# EAGLE board MODULO2_1 (EAGLE 7.1.0)
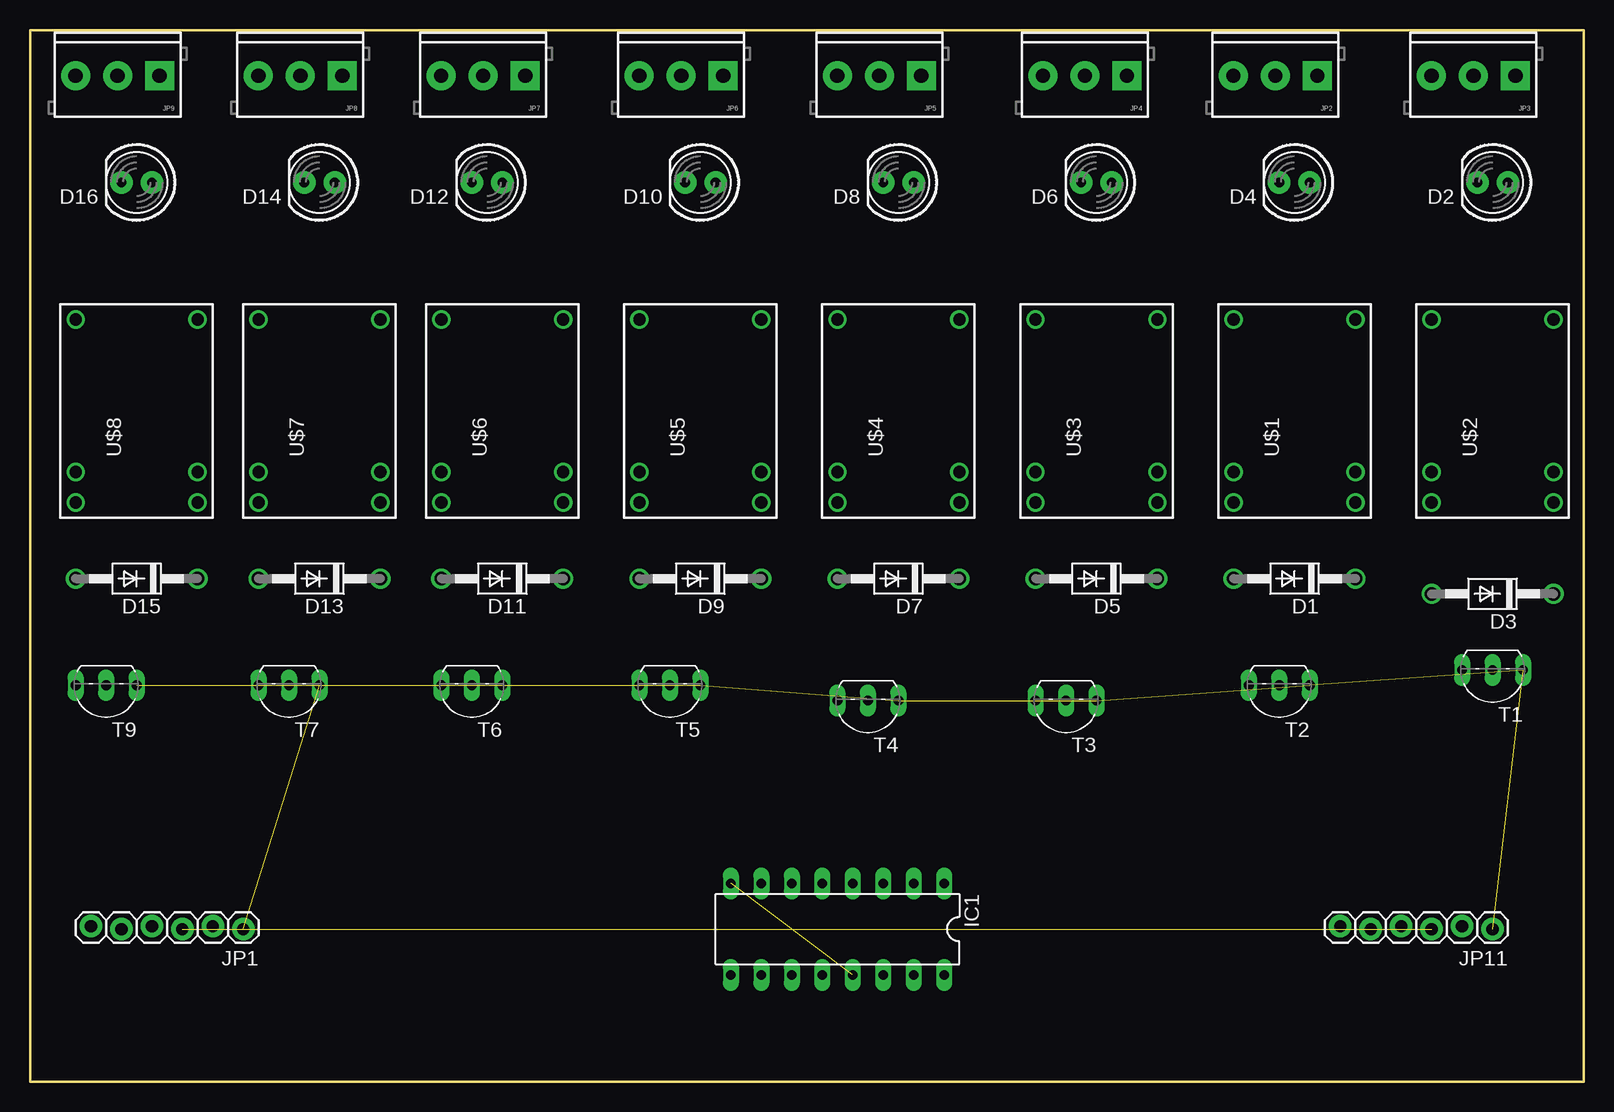
[diagram p0: board, top side]
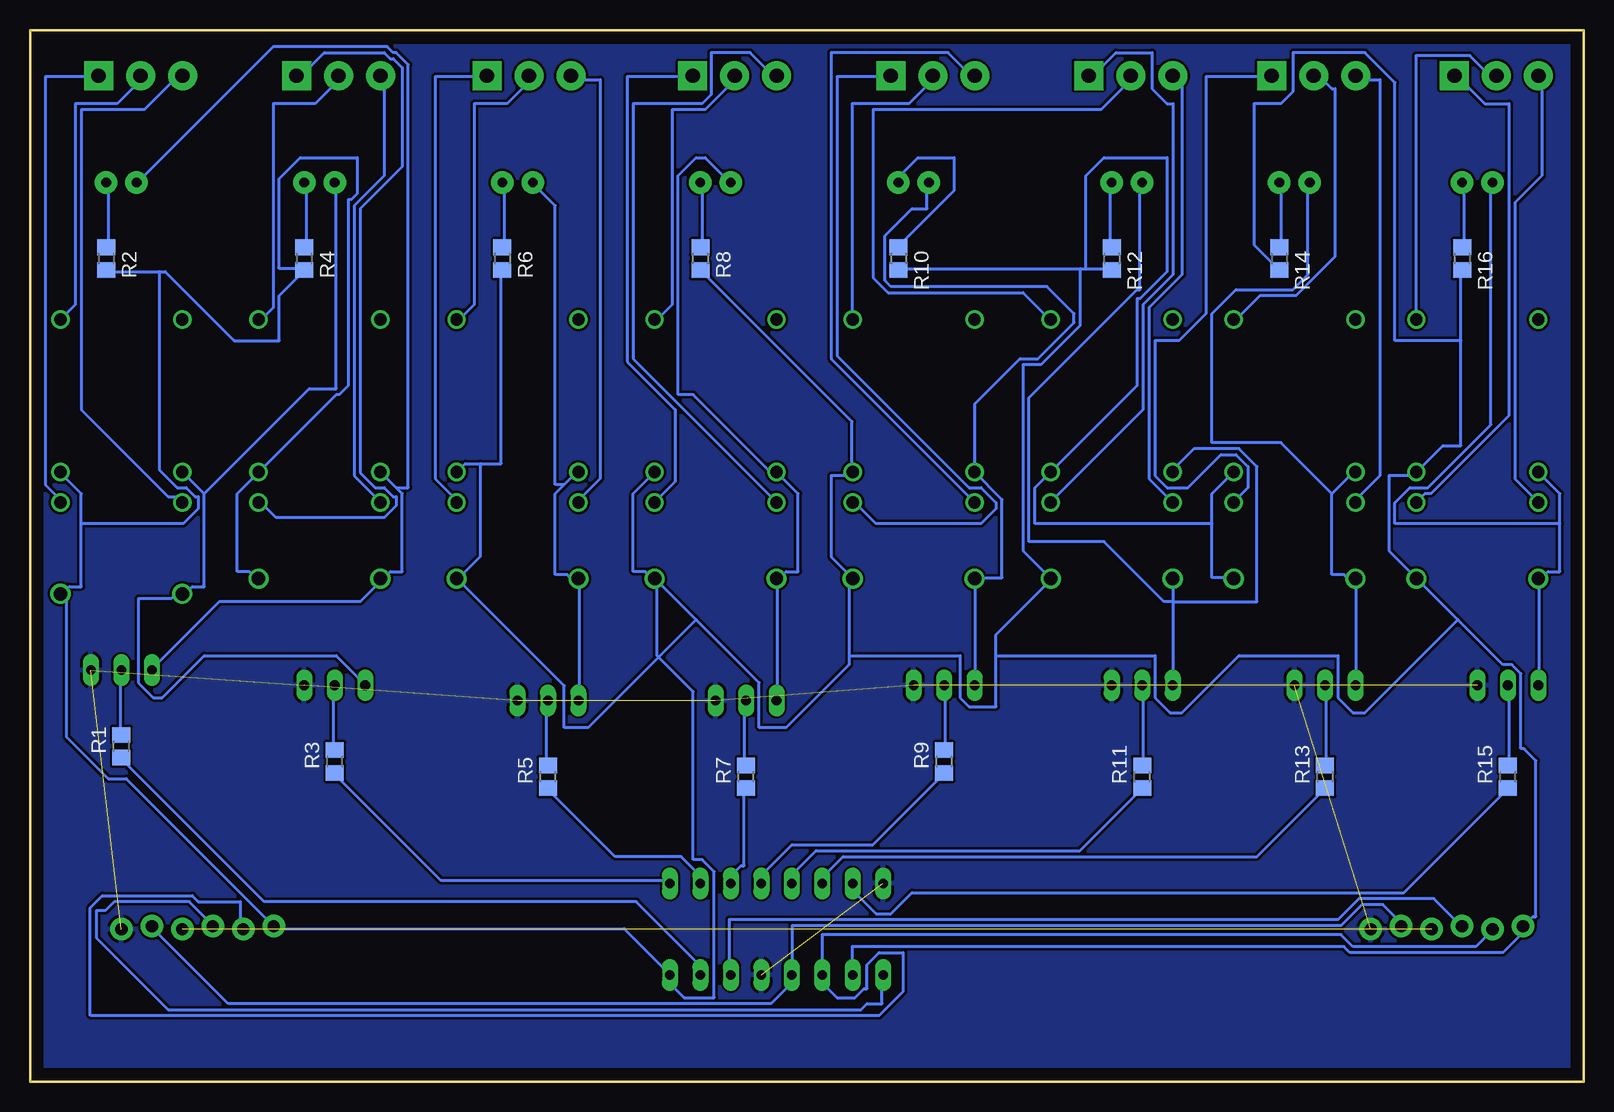
[diagram p1: board, bottom side, seen from below]

Size 129.54 x 87.63 mm. Coordinates in mm from the lower left corner, seen from the top.
Outline: 0,0 129.54,0 129.54,87.63 0,87.63 0,0
Copper layers (1*16): Top 0.035mm / dielectric 1.5mm / Bottom 0.035mm
Design rules "default": minimum track width 10mil, minimum drill 24mil, track to track 8mil, track to pad 8mil, pad to pad 8mil, via to via 8mil, smd to smd 8mil, copper to edge 40mil, drill to drill 8mil, minimum pad ring 10mil, minimum via ring 8mil, stop-mask expansion 4mil, vias tented up to drill 0mil, thermal gap 10mil

## Footprints (pad centres in the part's own frame; a part is rotated, then mirrored left to right if it is on the bottom)
DO41-10 = drill 1.118: A 5.08,0; C -5.08,0
LED5MM = drill 0.813 pad 1.88: A -1.27,0; K 1.27,0
DIL16 = drill 0.813 long: 1 -8.89,-3.81; 2 -6.35,-3.81; 3 -3.81,-3.81; 4 -1.27,-3.81; 5 1.27,-3.81; 6 3.81,-3.81; 7 6.35,-3.81; 8 8.89,-3.81; 9 8.89,3.81; 10 6.35,3.81; 11 3.81,3.81; 12 1.27,3.81; 13 -1.27,3.81; 14 -3.81,3.81; 15 -6.35,3.81; 16 -8.89,3.81
1X06_LOCK = drill 1.016 pad 1.88: 1 0,0; 2 2.54,-0.254; 3 5.08,0; 4 7.62,-0.254; 5 10.16,0; 6 12.7,-0.254
SCREWTERMINAL-3.5MM-3 = drill 1.2 pad 2.413 square: 1 0,0 | drill 1.2 pad 2.413: 2 3.5,0; 3 7,0
R0805 = smd 1.3 x 1.5: 1 -0.95,0; 2 0.95,0
TO92-EBC = drill 0.813 long: B 0,-1.27; C 2.54,-1.27; E -2.54,-1.27
HK4100 = drill 1.016: 1 7.62,5.08; 6 -5.08,5.08; 7 -7.62,5.08; 8 -7.62,-5.08; 9 -5.08,-5.08; 14 7.62,-5.08

## Placement (x,y rotation side)
D1  1N4933  [DO41-10]  105.41,41.91 180 top
D2  [LED5MM]  121.92,74.93 180 top
D3  1N4933  [DO41-10]  121.92,40.64 180 top
D4  [LED5MM]  105.41,74.93 180 top
D5  1N4933  [DO41-10]  88.9,41.91 180 top
D6  [LED5MM]  88.9,74.93 180 top
D7  1N4933  [DO41-10]  72.39,41.91 180 top
D8  [LED5MM]  72.39,74.93 180 top
D9  1N4933  [DO41-10]  55.88,41.91 180 top
D10  [LED5MM]  55.88,74.93 180 top
D11  1N4933  [DO41-10]  39.37,41.91 180 top
D12  [LED5MM]  38.1,74.93 180 top
D13  1N4933  [DO41-10]  24.13,41.91 180 top
D14  [LED5MM]  24.13,74.93 180 top
D15  1N4933  [DO41-10]  8.89,41.91 180 top
D16  [LED5MM]  8.89,74.93 180 top
IC1  74HC595N  [DIL16]  67.31,12.7 180 top
JP1  [1X06_LOCK]  17.78,12.7 180 top
JP2  [SCREWTERMINAL-3.5MM-3]  107.31,83.82 180 top
JP3  [SCREWTERMINAL-3.5MM-3]  123.83,83.82 180 top
JP4  [SCREWTERMINAL-3.5MM-3]  91.44,83.82 180 top
JP5  [SCREWTERMINAL-3.5MM-3]  74.3,83.82 180 top
JP6  [SCREWTERMINAL-3.5MM-3]  57.78,83.82 180 top
JP7  [SCREWTERMINAL-3.5MM-3]  41.27,83.82 180 top
JP8  [SCREWTERMINAL-3.5MM-3]  26.04,83.82 180 top
JP9  [SCREWTERMINAL-3.5MM-3]  10.79,83.82 180 top
JP11  [1X06_LOCK]  121.92,12.7 180 top
R1  [R0805]  121.92,27.94 90 bottom
R2  [R0805]  123.19,68.58 270 bottom
R3  [R0805]  104.14,26.67 90 bottom
R4  [R0805]  106.68,68.58 270 bottom
R5  [R0805]  86.36,25.4 90 bottom
R6  [R0805]  90.17,68.58 270 bottom
R7  [R0805]  69.85,25.4 90 bottom
R8  [R0805]  73.66,68.58 270 bottom
R9  [R0805]  53.34,26.67 90 bottom
R10  [R0805]  57.15,68.58 270 bottom
R11  [R0805]  36.83,25.4 90 bottom
R12  [R0805]  39.37,68.58 270 bottom
R13  [R0805]  21.59,25.4 90 bottom
R14  [R0805]  25.4,68.58 270 bottom
R15  [R0805]  6.35,25.4 90 bottom
R16  [R0805]  10.16,68.58 270 bottom
T1  [TO92-EBC]  121.92,33.02 180 top
T2  [TO92-EBC]  104.14,31.75 180 top
T3  [TO92-EBC]  86.36,30.48 180 top
T4  [TO92-EBC]  69.85,30.48 180 top
T5  [TO92-EBC]  53.34,31.75 180 top
T6  [TO92-EBC]  36.83,31.75 180 top
T7  [TO92-EBC]  21.59,31.75 180 top
T9  [TO92-EBC]  6.35,31.75 180 top
U$1  HK4100_DC5V_SHGHK  [HK4100]  105.41,55.88 90 top
U$2  HK4100_DC5V_SHGHK  [HK4100]  121.92,55.88 90 top
U$3  HK4100_DC5V_SHGHK  [HK4100]  88.9,55.88 90 top
U$4  HK4100_DC5V_SHGHK  [HK4100]  72.39,55.88 90 top
U$5  HK4100_DC5V_SHGHK  [HK4100]  55.88,55.88 90 top
U$6  HK4100_DC5V_SHGHK  [HK4100]  39.37,55.88 90 top
U$7  HK4100_DC5V_SHGHK  [HK4100]  24.13,55.88 90 top
U$8  HK4100_DC5V_SHGHK  [HK4100]  8.89,55.88 90 top

## Library data of the parts
D1 D3 D5 D7 D9 D11 D13 D15 = diode
D2 D4 D6 D8 D10 D12 D14 D16 = SparkFun-LED
IC1 = 74xx-eu
JP1 JP11 = SparkFun-Connectors
JP2-JP9 = SparkFun-Connectors; PROD_ID: CONN-08288
R1-R16 = resistor
T1-T7 T9 = transistor
U$1-U$8 = SparkFun-Electromechanical

## Nets
CS: IC1.12 JP1.2 JP11.2
GND: IC1.8 IC1.13 JP1.1 JP11.1 T1.E T2.E T3.E T4.E T5.E T6.E T7.E T9.E
N$1: IC1.15 R1.1
N$2: IC1.1 R3.1
N$3: D1.A D2.K T1.C U$1.6
N$4: D2.A R2.1
N$5: R1.2 T1.B
N$6: D3.A D4.K T2.C U$2.6
N$7: D5.A D6.K T3.C U$3.6
N$8: D6.A R6.1
N$9: R5.2 T3.B
N$10: D7.A D8.K T4.C U$4.6
N$11: D8.A R8.1
N$12: R7.2 T4.B
N$13: IC1.3 R7.1
N$14: D4.A R4.1
N$15: R3.2 T2.B
N$16: IC1.2 R5.1
N$17: D9.A D10.K T5.C U$5.6
N$18: D10.A R10.1
N$19: R9.2 T5.B
N$20: D11.A D12.K T6.C U$6.6
N$21: D12.A R12.1
N$22: R11.2 T6.B
N$23: D13.A D14.K T7.C U$7.6
N$24: D14.A R14.1
N$25: R13.2 T7.B
N$26: D15.A D16.K T9.C U$8.6
N$27: D16.A R16.1
N$28: R15.2 T9.B
N$29: IC1.5 R11.1
N$30: IC1.4 R9.1
N$31: IC1.6 R13.1
N$32: IC1.7 R15.1
N$33: JP2.1 U$1.8
N$34: JP2.2 U$1.14
N$35: JP2.3 U$1.7
N$36: JP3.1 U$2.8
N$37: JP3.2 U$2.14
N$38: JP3.3 U$2.7
N$39: JP4.1 U$3.8
N$40: JP4.2 U$3.14
N$41: JP4.3 U$3.7
N$42: JP5.1 U$4.8
N$43: JP5.2 U$4.14
N$44: JP5.3 U$4.7
N$45: JP6.1 U$5.8
N$46: JP6.2 U$5.14
N$47: JP6.3 U$5.7
N$48: JP7.1 U$6.8
N$49: JP7.2 U$6.14
N$50: JP7.3 U$6.7
N$51: JP8.1 U$7.8
N$52: JP8.2 U$7.14
N$53: JP8.3 U$7.7
N$54: JP9.1 U$8.8
N$55: JP9.2 U$8.14
N$56: JP9.3 U$8.7
QH: IC1.9 JP11.4
SCLK: IC1.11 JP1.5 JP11.5
SDI: JP1.3 JP11.3
SDO: IC1.14 JP1.4
VCC: D1.C D3.C D5.C D7.C D9.C D11.C D13.C D15.C IC1.10 IC1.16 JP1.6 JP11.6 R2.2 R4.2 R6.2 R8.2 R10.2 R12.2 R14.2 R16.2 U$1.9 U$2.9 U$3.9 U$4.9 U$5.9 U$6.9 U$7.9 U$8.9

## Tracks (layer width: path | path; a pad name or v marks a point on that pad's centre or on a via)
CS
  Bottom 0.254: JP1.2 15,13 16.75,14.75 18.5,14.75 20.25,13 66,13 66,9 IC1.12 66.25,8.75 66.25,8 67.75,6.5 113,6.5 119.25,12.75 JP11.2
GND  (10 unrouted)
  pour Bottom: 0,0 0,86.36 0,87.63 129.54,87.63 129.54,0
N$1
  Bottom 0.254: R1.1 121.75,26.75 110,15 79,15 73.75,9.75 73.75,9 IC1.15
N$2
  Bottom 0.254: R3.1 104,25.5 95.25,16.75 76.25,16.75 IC1.1
N$3
  Bottom 0.254: T1.C 119.25,34.5 113.75,40 102,40 100.25,41.75 D1.A 100.25,42 100,42 99.5,42.5 98.5,42.5 98.5,49 99,49.5 | 99,49.5 100.25,50.75 U$1.6 | 99,49.5 98,49.5 98,84.75 99,85.75 99.25,85.75 99.75,86.25 109.25,86.25 120.5,75 D2.K
N$4
  Bottom 0.254: R2.1 123,69.75 123,74.75 D2.A
N$5
  Bottom 0.254: R1.2 122,29 122,34.25 T1.B
N$6
  Bottom 0.254: T2.C 101.75,33.25 104,35.5 115,35.5 118.5,32 119.25,32 120.5,33.25 120.5,40.25 117.75,40.25 117.5,40.5 117,40.5 D3.A 116.75,40.75 116.5,40.75 116,41.25 115,41.25 115,49 | 115,49 116.75,50.75 U$2.6 | 115,49 106.25,57.75 104,57.75 104,74.75 D4.K
N$7
  Bottom 0.254: T3.C 83.75,31.75 83.75,41.75 D5.A 84,42 84.5,42 84.75,42.25 85.75,42.25 85.75,49 85,49.75 | 85,49.75 84,50.75 U$3.6 | 85,49.75 85.75,49.75 85.75,73 87.5,74.75 D6.K
N$8
  Bottom 0.254: R6.1 90,69.75 90,74.75 D6.A
N$9
  Bottom 0.254: R5.2 86.5,26.5 86.5,31.75 T3.B
N$10
  Bottom 0.254: T4.C 67.25,31.75 67.25,41.75 D7.A 67.25,42 67,42 66.5,42.5 65.5,42.5 65.5,49 67.25,50.75 U$4.6 67.5,51 68,51 74.25,57.25 75.5,57.25 75.5,75.5 74,77 73.25,77 71.25,75 D8.K
N$11
  Bottom 0.254: R8.1 73.5,69.75 73.5,74.75 D8.A
N$12
  Bottom 0.254: R7.2 70,26.5 70,31.75 T4.B
N$13
  Bottom 0.254: R7.1 70,24.25 70,18 70.25,18 71,17.25 71,16.75 IC1.3
N$14
  Bottom 0.254: R4.1 106.5,69.75 106.5,74.75 D4.A
N$15
  Bottom 0.254: R3.2 104.25,27.75 104.25,33 T2.B
N$16
  Bottom 0.254: R5.1 86.25,24.25 80.75,18.75 75.25,18.75 73.75,17.25 73.75,16.75 IC1.2
N$17
  Bottom 0.254: T5.C 50.75,33.25 50.75,41.75 D9.A 50.75,42 48.5,42 48.5,48.5 U$5.6 50.75,51 50.75,56.5 47,60.25 45.5,60.25 42.5,63.25 42.5,64 44.75,66.25 57.75,66.25 58.25,66.75 58.25,70.5 56,72.75 54.75,72.75 54.75,74.75 D10.K
N$18
  Bottom 0.254: R10.1 57,69.75 52.5,74.25 52.5,77 55.5,77 57,75.5 57,75 D10.A
N$19
  Bottom 0.254: R9.2 53.25,27.75 53.25,33 T5.B
N$20
  Bottom 0.254: 34.25,40 34.25,41.75 D11.A | 34.25,40 34.25,33.25 T6.C | 34.25,40 27.25,40 27.25,51.25 28.75,52.75 32.5,52.75 34.25,51 U$6.6 | 34.25,40 35,40 40,45 46.25,45 46.25,57 37.25,66 37,66 37,74.75 D12.K
N$21
  Bottom 0.254: R12.1 39.5,69.75 39.5,74.75 D12.A
N$22
  Bottom 0.254: R11.2 36.75,26.5 36.75,33 T6.B
N$23
  Bottom 0.254: T7.C 19,33.25 19,41.75 D13.A 19.25,42 19.75,42 20,42.25 21,42.25 21,49 | 21,49 19.25,50.75 U$7.6 | 21,49 25.25,53.25 31,53.25 31,64 29,66 24.25,66 23,67.25 23,74.75 D14.K
N$24
  Bottom 0.254: R14.1 25.25,69.75 25.25,74.75 D14.A
N$25
  Bottom 0.254: R13.2 21.5,26.5 21.5,33 T7.B
N$26
  Bottom 0.254: T9.C 3.75,33.25 3.75,41.75 D15.A 3.75,42 3.5,42 3,42.5 2,42.5 2,46.5 | 2,46.5 2,49 3.75,50.75 U$8.6 | 2,46.5 15.75,46.5 15.75,48.25 14.5,49.5 13,49.5 7.75,54.75 7.75,74.75 D16.K
N$27
  Bottom 0.254: R16.1 10,69.75 10,74.75 D16.A
N$28
  Bottom 0.254: R15.2 6.25,26.5 6.25,33 T9.B
N$29
  Bottom 0.254: R11.1 37,24.25 42,19.25 64,19.25 66,17.25 66,16.75 IC1.5
N$30
  Bottom 0.254: R9.1 53.5,25.5 59.25,19.75 66,19.75 68.5,17.25 68.5,16.75 IC1.4
N$31
  Bottom 0.254: IC1.6 63.5,17 61.75,18.75 27.25,18.75 21.75,24.25 R13.1
N$32
  Bottom 0.254: R15.1 6.5,24.25 15,15.75 56,15.75 57.75,14 59,14 60.75,15.75 60.75,16.5 IC1.7
N$33
  Bottom 0.254: U$1.8 110.25,48.25 109,47 100,47 99,48 99,48.75 99.25,48.75 100,49.5 100.75,49.5 102,50.75 102,72.75 98.5,76.25 98.5,84.5 99.25,85.25 99.5,85.25 100,85.75 105,85.75 106.75,84 107.25,84 JP2.1
N$34
  Bottom 0.254: U$1.14 110.25,63.5 109.25,64.5 109.25,81.5 105.75,81.5 104,83.25 104,83.75 JP2.2
N$35
  Bottom 0.254: U$1.7 100.5,48.5 102.5,50.5 102.5,73 100,75.5 100,83.75 100.25,83.75 JP2.3
N$36
  Bottom 0.254: U$2.8 127,48.5 128.25,49.75 128.25,83.75 124,83.75 JP3.1
N$37
  Bottom 0.254: U$2.14 125.75,64.75 125.75,81.5 122.25,81.5 120.5,83.25 120.5,83.75 JP3.2
N$38
  Bottom 0.254: U$2.7 117,48.5 117.25,48.75 118,48.75 125.25,56 125.25,81 120,81 117.25,83.75 117,83.75 JP3.3
N$39
  Bottom 0.254: U$3.8 94,48.5 95.75,50.25 95.75,83.75 91.5,83.75 JP4.1
N$40
  Bottom 0.254: U$3.14 93.75,63.5 92.5,64.75 92.5,81.5 89.75,81.5 88,83.25 88,83.75 JP4.2
N$41
  Bottom 0.254: U$3.7 83.75,48.5 82,50.25 82,83.5 84,83.5 84.25,83.75 JP4.3
N$42
  Bottom 0.254: U$4.8 77.25,48.5 75.75,50 75.75,56 79.75,60 79.75,83.75 74.5,83.75 JP5.1
N$43
  Bottom 0.254: U$4.14 77.25,63.5 76,64.75 76,81 73.25,81 71,83.25 71,83.75 JP5.2
N$44
  Bottom 0.254: U$4.7 67.5,48.5 79.25,60.25 79.25,81.5 73.5,81.5 72.75,82.25 72.75,85.75 69.5,85.75 67.75,84 67.5,84 JP5.3
N$45
  Bottom 0.254: U$5.8 60.75,48.25 59,46.5 50.25,46.5 49,47.75 49,48.25 50.25,49.5 51.25,49.5 62.25,60.5 62.25,83.75 58,83.75 JP6.1
N$46
  Bottom 0.254: U$5.14 61,63.5 61,81.5 56.25,81.5 54.5,83.25 54.5,83.75 JP6.2
N$47
  Bottom 0.254: U$5.7 51,48.5 62.75,60.25 62.75,85.75 53,85.75 51.25,84 51,84 JP6.3
N$48
  Bottom 0.254: U$6.8 44.25,48.5 36.75,56 36.75,64.75 34.25,67.25 34.25,81.5 34.75,81.5 36,82.75 36,85.75 39,85.75 40.75,84 41.25,84 JP7.1
N$49
  Bottom 0.254: U$6.14 44.5,63.5 46.75,65.75 58,65.75 59.25,67 59.25,81 40.25,81 38,83.25 38,83.75 JP7.2
N$50
  Bottom 0.254: U$6.7 34.5,48.5 36.25,50.25 36.25,64.5 33.5,67.25 33.5,83.75 34.25,83.75 JP7.3
N$51
  Bottom 0.254: U$7.8 29,48.5 28,49.5 28,51.25 29,52.25 30.25,52.25 33,49.5 34.75,49.5 35.75,50.5 35.75,61.75 33.75,61.75 31.5,64 31.5,83.75 26.25,83.75 JP8.1
N$52
  Bottom 0.254: U$7.14 29,63.5 27,65.5 24,65.5 20.75,68.75 20.75,82.75 21,82.75 22,83.75 22.5,83.75 JP8.2
N$53
  Bottom 0.254: U$7.7 19,48.5 17,50.5 17,83.5 18.75,83.5 19,83.75 JP8.3
N$54
  Bottom 0.254: U$8.8 13.75,48.5 13.25,49 12.75,49 6.25,55.5 6.25,81.5 8.25,81.5 10.5,83.75 10.75,83.75 JP9.1
N$55
  Bottom 0.254: U$8.14 14,63.5 14,85.5 9.5,85.5 8,84 7.5,84 JP9.2
N$56
  Bottom 0.254: U$8.7 4,48.5 5.75,50.25 5.75,73.25 3.5,75.5 3.5,83.75 3.75,83.75 JP9.3
QH
  Bottom 0.254: IC1.9 58.5,8.75 58.5,6.5 59.75,6.5 60.25,6 118,6 124,12 124,14.25 123.25,14.25 122.5,15 116.25,15 114.25,13 JP11.4
SCLK
  Bottom 0.254: JP1.5 7.75,12.5 9,11.25 19.25,11.25 20.25,12.25 63.5,12.25 IC1.11 63.5,8.25 62.25,7 60.75,7 60,7.75 59.75,7.75 59.75,9.75 58.75,10.75 56.75,10.75 56.75,7.5 58.75,5.5 124.5,5.5 124.5,14.5 123.5,15.5 116,15.5 115.5,15 112,15 112,12.75 JP11.5
SDI  (1 unrouted)
SDO
  Bottom 0.254: IC1.14 71.25,9 71.25,13.5 20.5,13.5 18.75,15.25 12.5,15.25 10.25,13 JP1.4
VCC
  Bottom 0.254: 10.25,61.75 10.25,53 11.75,53 13.75,51 U$8.9 14,50.75 14.25,50.5 16.25,50.5 16.25,44.25 14,42 D15.C 13.75,41.75 10.5,38.5 | 10.25,61.75 10.25,67.5 R16.2 | 10.25,61.75 15.75,61.75 15.75,83.25 18.25,85.75 24.25,85.75 24.25,82.5 25.25,81.5 27.5,81.5 27.5,69.75 25.5,67.75 R14.2 | IC1.10 61,9 61,11.25 20,11.25 19.5,10.75 6.75,10.75 5.25,12.25 5.25,12.75 JP1.6 5,13 4.25,13.75 4,13.75 4,26.75 5,27.75 5.25,27.75 5.25,34 6,34.75 6.75,34.75 10.5,38.5 | 31,46.5 31,42 29.25,42 D13.C | 31,46.5 31,49 29.25,50.75 U$7.9 | 31,46.5 45.75,46.5 45.75,49.5 U$6.9 37.25,58 37.25,65.25 37,65.25 34.75,67.5 34.75,77 40,77 41.5,75.5 41.5,67.75 | 42,67.75 57,67.75 R10.2 | 42,67.75 41.5,67.75 | 41.5,67.75 39.5,67.75 R12.2 | 42,67.75 42,63 45.25,59.75 46.75,59.75 46.75,44.25 44.5,42 D11.C 44.5,41.75 49,37.25 49,35.5 | 92,51.5 93.25,51.5 93.75,51 U$3.9 | 92,51.5 90.25,51.5 90.25,67.5 R6.2 | 92,51.5 92,43.75 93.75,42 D5.C 93.75,41.75 85,33 85,29.5 83,29.5 74,38.5 | U$4.9 77.5,50.75 79.25,49 79.25,42.5 78.25,42.5 77.75,42 77.5,42 D7.C 77.25,41.75 | R8.2 73.5,67.5 61,55 61,51 U$5.9 61,50.75 61.25,50.5 62.75,50.5 62.75,43.75 61,42 D9.C 61,41.75 61.25,41.75 61.25,35.5 | 74,38.5 68.75,33.25 68.75,29.5 66.5,29.5 61.25,34.75 61.25,35.5 | 74,38.5 77.25,41.75 | 49,35.5 49,31.25 51.25,31.25 52,32 52,35.5 61.25,35.5 | 125.25,46.5 125.25,41.25 126.25,41.25 126.5,41 | 125.25,46.5 125.25,49 127,50.75 U$2.9 | 126.5,41 126.75,40.75 127,40.75 D3.C 126.5,41 | D1.C 110.5,42 110.75,42 111.25,42.5 112.25,42.5 112.25,49 110.5,50.75 U$1.9 110.25,51 104,57.25 103.75,57.25 103,58 103,73.5 102.75,73.5 102.25,74 102.25,77 107,77 108.75,75.25 108.75,67.75 106.75,67.75 R4.2 106.75,67.5 108.75,65.5 108.75,61.75 112.5,61.75 118.25,67.5 118.75,67.5
  Bottom 0.254: 118.75,67.5 123,67.5 R2.2 | 125.25,46.5 116.75,46.5 115.5,47.75 115.5,48.75 115.75,48.75 116.5,49.5 117.25,49.5 118.75,51 118.75,67.5 | 126.5,41 126.5,28.75 123,25.25 121.5,25.25 109.25,13 JP11.6 109,12.75 80,12.75 76.25,9 IC1.16 76,8.75 76,8 75,7 72.5,7 72.5,17.5 73.5,18.5 74.25,18.5 74.25,32.5 77.25,35.5 77.25,41.75 | 10.5,38.5 18.25,30.75 19.25,30.75 20.5,32 20.5,35.5 28.75,35.5 33.5,30.75 34.5,30.75 35.75,32 35.75,35.5 49,35.5